# EAGLE board slave-basic (EAGLE 8.4.0)
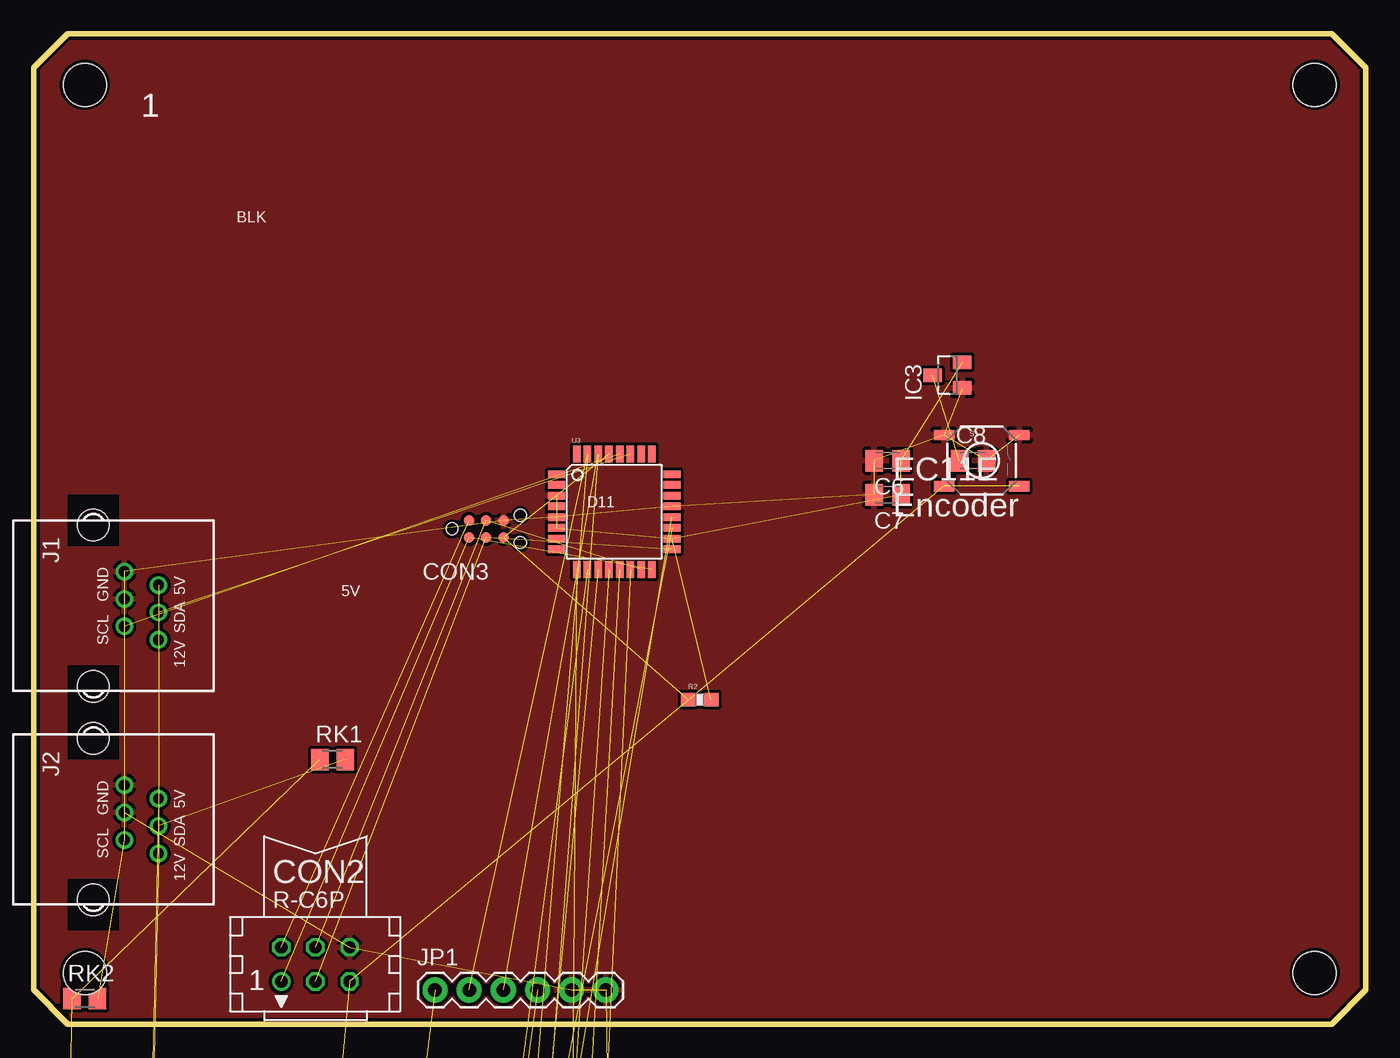
[diagram p0: board, top side]

Size 99.06 x 73.66 mm. Coordinates in mm from the lower left corner, seen from the top.
Outline: 0,71.12 0,2.54 2.54,0 96.52,0 99.06,2.54 99.06,71.12 96.52,73.66 2.54,73.66 0,71.12
Copper layers (1*16): Top 0.035mm / dielectric 0.2mm / Bottom 0.035mm
Design rules "SeeedStudio_DRU_no_angle_20130527 *": minimum track width 6mil, minimum drill 12mil, track to track 6mil, track to pad 6mil, pad to pad 6mil, via to via 6mil, smd to smd 0mil, copper to edge 10mil, drill to drill 10mil, minimum pad ring 6mil, minimum via ring 6mil, stop-mask expansion 2mil, vias tented up to drill 25mil, thermal gap 10mil
Net classes: 0 default: width 0.406 mm, clearance 0.25 mm; 1 power: width 0.406 mm, drill 0.305 mm, clearance 0.25 mm; 2 VIN: width 0.406 mm, clearance 0.25 mm; 3 fine: width 0.406 mm, clearance 0.25 mm; 4 aref: width 0.406 mm, clearance 0.25 mm
Holes 3.2 mm at 3.81,69.85 3.81,3.81 95.25,69.85 95.25,3.81

## Footprints (pad centres in the part's own frame; a part is rotated, then mirrored left to right if it is on the bottom)
C0805K = smd 1.3 x 1.6: 1 -1,0; 2 1,0
TINYISP = drill 0.914 octagon: GND 2.54,1.27; MOSI 0,1.27; RESET 2.54,-1.27; SCK 0,-1.27; VCC -2.54,1.27 | drill 0.914: MISO -2.54,-1.27
TC2030-MCP-NL = smd 0.787 x 0.787: 5V 1.27,0.635; GND 3.81,0.635; MISO 1.27,-0.635; MOSI 2.54,0.635; RESET 3.81,-0.635; SCK 2.54,-0.635 | hole 0.889: 0,0; 5.08,-1.016; 5.08,1.016
SOD123 = smd 1.4 x 1.4: A 1.9,0; C -1.9,0
SOT23 = smd 1 x 1.4: 1 -0.95,-1.1; 2 0.95,-1.1; 3 0,1.1
RJ12-RIGHTANGLE-I2C = drill 0.8 pad 1.3: +5V -1.54,4.84; +12V 2.54,4.84; GND1 -2.54,2.3; GND2 -0.5,2.3; SCL 1.54,2.3; SDA 0.5,4.84 | hole 2.36: -6,0; 6,0
1X06 = drill 1.016 pad 1.88: 1 0,0; 2 2.54,0; 3 5.08,0; 4 7.62,0; 5 10.16,0; 6 12.7,0
LCD-16X2-4HOLES = drill 1.016 square: 1 -32,15.5 | drill 1.016: 2 -29.46,15.5; 3 -26.92,15.5; 4 -24.38,15.5; 5 -21.84,15.5; 6 -19.3,15.5; 7 -16.76,15.5; 8 -14.22,15.5; 9 -11.68,15.5; 10 -9.14,15.5; 11 -6.6,15.5; 12 -4.06,15.5; 13 -1.52,15.5; 14 1.02,15.5; 15 3.56,15.5; 16 6.1,15.5 | hole 3.2: -37.6,15.5; -37.6,-15.5; 37.6,-15.5; 37.6,15.5
TRIMMER_3362P = drill 0.8: 1 -2.54,-0.31; 2 0,2.54; 3 2.54,-0.31
R0805 = smd 1.3 x 1.5: 1 -0.95,0; 2 0.95,0
0603-RES = smd 1.1 x 1: 1 -0.85,0; 2 0.85,0
M0805 = smd 1.3 x 1.6: 1 -0.95,0; 2 0.95,0
TACTILE-SWITCH-SMD-ALT01 = smd 1.524 x 0.762: 1 -2.794,1.905; 2 2.794,1.905; 3 -2.794,-1.905; 4 2.794,-1.905
TQFP32-08 = smd 1.27 x 0.559: 1 -4.293,2.8; 2 -4.293,2; 3 -4.293,1.2; 4 -4.293,0.4; 5 -4.293,-0.4; 6 -4.293,-1.2; 7 -4.293,-2; 8 -4.293,-2.8; 17 4.293,-2.8; 18 4.293,-2; 19 4.293,-1.2; 20 4.293,-0.4; 21 4.293,0.4; 22 4.293,1.2; 23 4.293,2; 24 4.293,2.8 | smd 0.559 x 1.27: 9 -2.8,-4.293; 10 -2,-4.293; 11 -1.2,-4.293; 12 -0.4,-4.293; 13 0.4,-4.293; 14 1.2,-4.293; 15 2,-4.293; 16 2.8,-4.293; 25 2.8,4.293; 26 2,4.293; 27 1.2,4.293; 28 0.4,4.293; 29 -0.4,4.293; 30 -1.2,4.293; 31 -2,4.293; 32 -2.8,4.293
EC11E = drill 1.2 square: A -2.5,0; B 0,0; C 2.5,0; D -2.5,14.5; E 2.5,14.5 | drill 2.8 square: P$1 6.25,7.5; P$2 -6.25,7.5

## Placement (x,y rotation side)
C1  100nF  [C0805K]  -0.64,-248.28 0 top  (outside the outline)
C3  100nF  [C0805K]  -0.64,-254 0 top  (outside the outline)
C4  100nF  [C0805K]  -0.64,-259.71 0 top  (outside the outline)
C6  10u  [C0805K]  63.5,41.91 180 top
C7  100nF  [C0805K]  63.5,39.37 180 top
C8  10u  [C0805K]  69.85,41.91 0 top
CON2  SPI  [TINYISP]  20.95,4.45 0 top
CON3  SPI  [TC2030-MCP-NL]  31.11,36.83 0 top
D1  Schottky  [SOD123]  1.91,-225.43 0 top  (outside the outline)
D2  Schottky  [SOD123]  1.91,-231.14 0 top  (outside the outline)
D3  Schottky  [SOD123]  1.91,-236.85 0 top  (outside the outline)
D4  Schottky  [SOD123]  1.91,-242.57 0 top  (outside the outline)
IC3  MCP1703CB  [SOT23]  67.94,48.26 90 top
J1  RJ12RIGHTANGLE-I2C  [RJ12-RIGHTANGLE-I2C]  4.45,31.11 270 top
J2  RJ12RIGHTANGLE-I2C  [RJ12-RIGHTANGLE-I2C]  4.45,15.24 270 top
JP1  FTDI Basic  [1X06]  29.84,2.54 0 top
LCD  LCD-HD447804-HOLES16X2-4-HOLES  [LCD-16X2-4HOLES]  38.1,-151.13 0 top  (outside the outline)
POT  10k  [TRIMMER_3362P]  6.35,-177.8 0 top  (outside the outline)
R1  100  [R0805]  22.86,-172.72 0 top  (outside the outline)
R2  10K  [0603-RES]  49.53,24.13 0 top
R10  0  [R0805]  17.14,-172.72 0 top  (outside the outline)
RK1  10K  [M0805]  22.23,19.68 0 top
RK2  10K  [M0805]  3.81,1.91 0 top
S1  Reset  [TACTILE-SWITCH-SMD-ALT01]  70.48,41.91 0 top
U3  ATMEGA328  [TQFP32-08]  43.18,38.1 0 top
U$1  EC11E  [EC11E]  22.86,-210.82 0 top  (outside the outline)

## Library data of the parts
C1 C3 C4 C7 = rcl; ELECROW: C49678; LCSC: C49678; MPN: 80-C1206C104K5R
C6 C8 = rcl; ELECROW: C15850; LCSC: C15850; MPN: 77-VJ1206V106ZXQTBC
CON2 = lpatiny; OC_FARNELL: unknown; OC_NEWARK: unknown
CON3 J1 J2 U$1 = lpatiny
D1-D4 = diode; LCSC: C82544; MPN: 621-1N5819HW-F
IC3 = linear; LCSC: C53352
JP1 R2 U3 = SparkFun
LCD = HD44780LCD
POT = dp_devices
R1 = rcl; ELECROW: C17408; LCSC: C17408
R10 = rcl; ELECROW: C17477; LCSC: C17477
RK1 RK2 = resistor
S1 = Testing

## Nets
3.3V [power]: C4.1 RK1.1 RK2.1
+5V: D1.A J1.+5V J2.+5V
+12V [power]: D3.A J1.+12V J2.+12V
A0: U3.23
A1: U3.24
A2: U3.25
A3: U3.26
A6: LCD.4 U3.19
A7: U3.22
AREF: C3.1 U3.20
D2: U3.32
D3: U3.1
D4: U3.2
D5: LCD.14 U3.9
D6: LCD.6 U3.10
D7: U3.11 U$1.D
D8: LCD.11 U3.12
D9: LCD.12 U3.13
D10: LCD.13 U3.14
D13: LCD.2 POT.3 R10.1
DTR: C1.1 JP1.1
FTDI+5V: D4.A JP1.4
GND [power]: C3.2 C4.2 C6.2 C7.2 C8.2 CON2.GND CON3.GND IC3.1 J1.GND1 J1.GND2 J2.GND1 J2.GND2 JP1.5 JP1.6 LCD.1 LCD.5 LCD.16 R1.2 S1.1 S1.2 U3.3 U3.5 U3.21 U$1.C U$1.E
ISP+5V: CON2.VCC CON3.5V
ISP+5V1: D2.A
MISO: CON2.MISO CON3.MISO U3.16
MOSI: CON2.MOSI CON3.MOSI U3.15
N$1 [power]: C8.1 IC3.3
N$2: LCD.3 POT.2
N$3: D1.C D2.C D3.C D4.C
N$4: POT.1 R1.1
N$11: LCD.15 R10.2
RESET: C1.2 CON2.RESET CON3.RESET R2.1 S1.3 S1.4 U3.29
RX: JP1.3 U3.30 U$1.B
SCK: CON2.SCK CON3.SCK U3.17
SCL: J1.SCL J2.SCL RK2.2 U3.28
SDA: J1.SDA J2.SDA RK1.2 U3.27
TX: JP1.2 U3.31 U$1.A
VCC: C6.1 C7.1 IC3.2 R2.2 U3.4 U3.6 U3.18

## Tracks (layer width: path | path; a pad name or v marks a point on that pad's centre or on a via)
3.3V  (2 unrouted)
+5V  (2 unrouted)
+12V  (2 unrouted)
A6  (1 unrouted)
AREF  (1 unrouted)
D5  (1 unrouted)
D6  (1 unrouted)
D7  (1 unrouted)
D8  (1 unrouted)
D9  (1 unrouted)
D10  (1 unrouted)
D13  (2 unrouted)
DTR  (1 unrouted)
FTDI+5V  (1 unrouted)
GND  (24 unrouted)
  pour Top: 0,71.12 0,2.54 2.54,0 96.52,0 99.06,2.54 99.06,71.12 96.52,73.66 2.54,73.66
ISP+5V  (1 unrouted)
MISO  (2 unrouted)
MOSI  (2 unrouted)
N$1  (1 unrouted)
N$2  (1 unrouted)
N$3  (3 unrouted)
N$4  (1 unrouted)
N$11  (1 unrouted)
RESET  (6 unrouted)
RX  (2 unrouted)
SCK  (2 unrouted)
SCL  (3 unrouted)
SDA  (3 unrouted)
TX  (2 unrouted)
VCC  (6 unrouted)

## Text on the board
tNames: 1 | BLK | D11 | EC11E / Encoder | 5V
bNames: Bio4_LCD_v1.1
tValues: Simple spectro / V 1.6.0
bValues: GND | Simple spectro / V1.6.0